# EAGLE board FredT232H.Board (EAGLE 9.6.2)

Size 88 x 77 mm. Coordinates in mm from the lower left corner, seen from the top.
Outline: 0,3 0,73 arc-90 4,77 84,77 arc-90 88,73 88,3 arc-90 85,0 3,0 arc-90 0,3
Copper layers (1*16): Top 0.035mm / dielectric 1.5mm / Bottom 0.035mm
Design rules "default": minimum track width 10mil, minimum drill 24mil, track to track 8mil, track to pad 8mil, pad to pad 8mil, via to via 8mil, smd to smd 8mil, copper to edge 40mil, drill to drill 8mil, minimum pad ring 10mil, minimum via ring 8mil, stop-mask expansion 4mil, vias tented up to drill 0mil, thermal gap 10mil

## Footprints (pad centres in the part's own frame; a part is rotated, then mirrored left to right if it is on the bottom)
1X11 = drill 1.016 long: 1 -12.7,0; 2 -10.16,0; 3 -7.62,0; 4 -5.08,0; 5 -2.54,0; 6 0,0; 7 2.54,0; 8 5.08,0; 9 7.62,0; 10 10.16,0; 11 12.7,0
1X10-BIG = drill 1.016 pad 1.778 octagon: 1 -11.43,0; 2 -8.89,0; 3 -6.35,0; 4 -3.81,0; 5 -1.27,0; 6 1.27,0; 7 3.81,0; 8 6.35,0; 9 8.89,0; 10 11.43,0
3,3-PAD = drill 3.3 pad 5.842: B3,3 0,0
EG1218 = drill 0.9 pad 1.676: O -2.54,0; P 0,0; S 2.54,0
1X04 = drill 1.016 long: 1 -3.81,0; 2 -1.27,0; 3 1.27,0; 4 3.81,0
1X02 = drill 1.016 long: 1 -1.27,0; 2 1.27,0
1206 = smd 1.6 x 1.803: A -1.422,0; C 1.422,0
R1206 = smd 1.6 x 1.803: 1 -1.422,0; 2 1.422,0
SIP10 = drill 0.6 long: 1 -11.46,0; 2 -8.92,0; 3 -6.38,0; 4 -3.84,0; 5 -1.3,0; 6 1.24,0; 7 3.78,0; 8 6.32,0; 9 8.86,0; 10 11.4,0

## Placement (x,y rotation side)
FT232H__SPI  [1X11]  72,47 0 top
FT232H_GPIO  [1X11]  72,27 0 top
GPIO_OUT  PINHD-1X10  [1X10-BIG]  24.2,2.5 180 top
H1  MOUNT-PAD-ROUND3.3  [3,3-PAD]  82,6 0 top
H2  MOUNT-PAD-ROUND3.3  [3,3-PAD]  6,71 0 top
H3  MOUNT-PAD-ROUND3.3  [3,3-PAD]  6,6 0 top
H4  MOUNT-PAD-ROUND3.3  [3,3-PAD]  82,71 0 top
I2C_DTA_CONN  [EG1218]  43,31.5 0 top
I2C_OUT_1  [1X04]  61,74 180 top
I2C_OUT_2  [1X04]  61,2.5 0 top
I2C_PULL_UP_MODE  [EG1218]  43,41 0 top
JP_5V  [1X02]  3,17 270 top
LED_G_0  [1206]  16.5,14 90 top
LED_G_1  [1206]  19,14 90 top
LED_G_2  [1206]  21.5,14 90 top
LED_G_3  [1206]  24,14 90 top
LED_G_4  [1206]  26.5,14 90 top
LED_G_5  [1206]  29,14 90 top
LED_G_6  [1206]  31.5,14 90 top
LED_G_7  [1206]  34.1,14 90 top
LED_POWER  [1206]  73.88,57.87 180 top
R_4K  [R1206]  71.73,52 0 top
R_ARRAY_1  [SIP10]  24.5,39.12 270 top
R_PULL_UP_SCL_4K  [R1206]  35,52 0 top
R_PULL_UP_SDA_4K  [R1206]  15,52 0 top
SPI_OUT_1  PINHD-1X10  [1X10-BIG]  2.5,37 90 top
SPI_OUT_2  PINHD-1X10  [1X10-BIG]  24.2,74 0 top

## Library data of the parts
FT232H__SPI FT232H_GPIO I2C_OUT_1 I2C_OUT_2 JP_5V = pinhead
GPIO_OUT I2C_DTA_CONN I2C_PULL_UP_MODE LED_G_0 LED_G_1-LED_G_7 LED_POWER R_4K R_PULL_UP_SCL_4K R_PULL_UP_SDA_4K SPI_OUT_1 SPI_OUT_2 = adafruit
H1-H4 = holes
R_ARRAY_1 = resistor-sip

## Nets
C0: FT232H_GPIO.1 GPIO_OUT.10 LED_G_0.A
C1: FT232H_GPIO.2 GPIO_OUT.9 LED_G_1.A
C2: FT232H_GPIO.3 GPIO_OUT.8 LED_G_2.A
C3: FT232H_GPIO.4 GPIO_OUT.7 LED_G_3.A
C4: FT232H_GPIO.5 GPIO_OUT.6 LED_G_4.A
C5: FT232H_GPIO.6 GPIO_OUT.5 LED_G_5.A
C6: FT232H_GPIO.7 GPIO_OUT.4 LED_G_6.A
C7: FT232H_GPIO.8 GPIO_OUT.3 LED_G_7.A
D0_SCLK: FT232H__SPI.8 I2C_OUT_1.1 I2C_OUT_2.1 R_PULL_UP_SCL_4K.1 SPI_OUT_1.10 SPI_OUT_2.10
D1_MOSI: FT232H__SPI.7 I2C_DTA_CONN.P R_PULL_UP_SDA_4K.1 SPI_OUT_1.9 SPI_OUT_2.9
D2_MISO: FT232H__SPI.6 I2C_DTA_CONN.O I2C_OUT_1.2 I2C_OUT_2.2 SPI_OUT_1.8 SPI_OUT_2.8
D3_CS0: FT232H__SPI.5 SPI_OUT_1.7 SPI_OUT_2.7
D4_CS1: FT232H__SPI.4 SPI_OUT_1.6 SPI_OUT_2.6
D5_CS2: FT232H__SPI.3 SPI_OUT_1.5 SPI_OUT_2.5
D6_CS3: FT232H__SPI.2 SPI_OUT_1.4 SPI_OUT_2.4
D7_CS4: FT232H__SPI.1 SPI_OUT_1.3 SPI_OUT_2.3
DO_NOT_USE: R_ARRAY_1.10
GND: FT232H__SPI.9 FT232H_GPIO.11 GPIO_OUT.1 H1.B3,3 H2.B3,3 H3.B3,3 H4.B3,3 I2C_OUT_1.4 I2C_OUT_2.4 JP_5V.1 R_4K.1 R_ARRAY_1.1 SPI_OUT_1.1 SPI_OUT_2.1
N$1: LED_POWER.C R_4K.2
N$2: I2C_PULL_UP_MODE.O R_PULL_UP_SCL_4K.2 R_PULL_UP_SDA_4K.2
R_G_0: LED_G_0.C R_ARRAY_1.2
R_G_1: LED_G_1.C R_ARRAY_1.3
R_G_2: LED_G_2.C R_ARRAY_1.4
R_G_3: LED_G_3.C R_ARRAY_1.5
R_G_4: LED_G_4.C R_ARRAY_1.6
R_G_5: LED_G_5.C R_ARRAY_1.7
R_G_6: LED_G_6.C R_ARRAY_1.8
R_G_7: LED_G_7.C R_ARRAY_1.9
VCC_5: FT232H__SPI.10 JP_5V.2 LED_POWER.A
VCC_33: FT232H__SPI.11 GPIO_OUT.2 I2C_OUT_1.3 I2C_OUT_2.3 I2C_PULL_UP_MODE.P SPI_OUT_1.2 SPI_OUT_2.2

## Tracks (layer width: path | path; a pad name or v marks a point on that pad's centre or on a via)
C0  (2 unrouted)
C1  (2 unrouted)
C2  (2 unrouted)
C3  (2 unrouted)
C4  (2 unrouted)
C5  (2 unrouted)
C6  (2 unrouted)
C7  (2 unrouted)
D0_SCLK  (5 unrouted)
D1_MOSI  (4 unrouted)
D2_MISO  (5 unrouted)
D3_CS0  (2 unrouted)
D4_CS1  (2 unrouted)
D5_CS2  (2 unrouted)
D6_CS3  (2 unrouted)
D7_CS4  (2 unrouted)
GND  (13 unrouted)
N$1  (1 unrouted)
N$2  (2 unrouted)
R_G_0  (1 unrouted)
R_G_1  (1 unrouted)
R_G_2  (1 unrouted)
R_G_3  (1 unrouted)
R_G_4  (1 unrouted)
R_G_5  (1 unrouted)
R_G_6  (1 unrouted)
R_G_7  (1 unrouted)
VCC_5  (2 unrouted)
VCC_33  (6 unrouted)

## Text on the board
tNames: GND | MISO | MOSI | SCLK | GND | SDA | SCL | D7 CS4 | D6 CS3 | D5 CS2 | D4 CS1 | D3 CS0 | VCC_3.3V | VCC_3.3V | + | GND | 5V | 3.3V | D7 | SCLK | MOSI | MISO | D3 CS0 | D4 CS1 | ON | OFF | D5 CS2 | D6 CS3 | D7 CS4 | VCC_3.3V | GND | GND | C0 | C7 | GND | GND | VCC_5V | + | VCC_3.3V | VCC_3V | SCL | SDA | GND | GND | C0 | C1 | C2 | C3\ | C4 | C5 | C6\ | C7 | C:/DVT/Fred.PCB/2023/FredT232H.Board/Nusbio.Slash.2.Gray.bmp | C:/DVT/Fred.PCB/2023/FredT232H.Board/Nusbio.Slash.2.Gray.bmp | C:/DVT/Fred.PCB/2023/MadeInTheUSB.Logo.Gray.50.bmp | C:/DVT/Fred.PCB/2023/MadeInTheUSB.Logo.Gray.50.bmp
bNames: Nusbio /2 | www.FredericTorres.com | PCBv2 - 2023.03